# Altium PCB Motor PSU Webench.PcbDoc
Units mil, origin at the board's own origin, x right, y up, seen from the top; angles counter-clockwise.
Board outline 3150 x 2500 mil, 4 copper layers (Top Layer, MidLayer1, MidLayer2, Bottom Layer); 21 components, 13 nets, 50 pads, 42 vias.
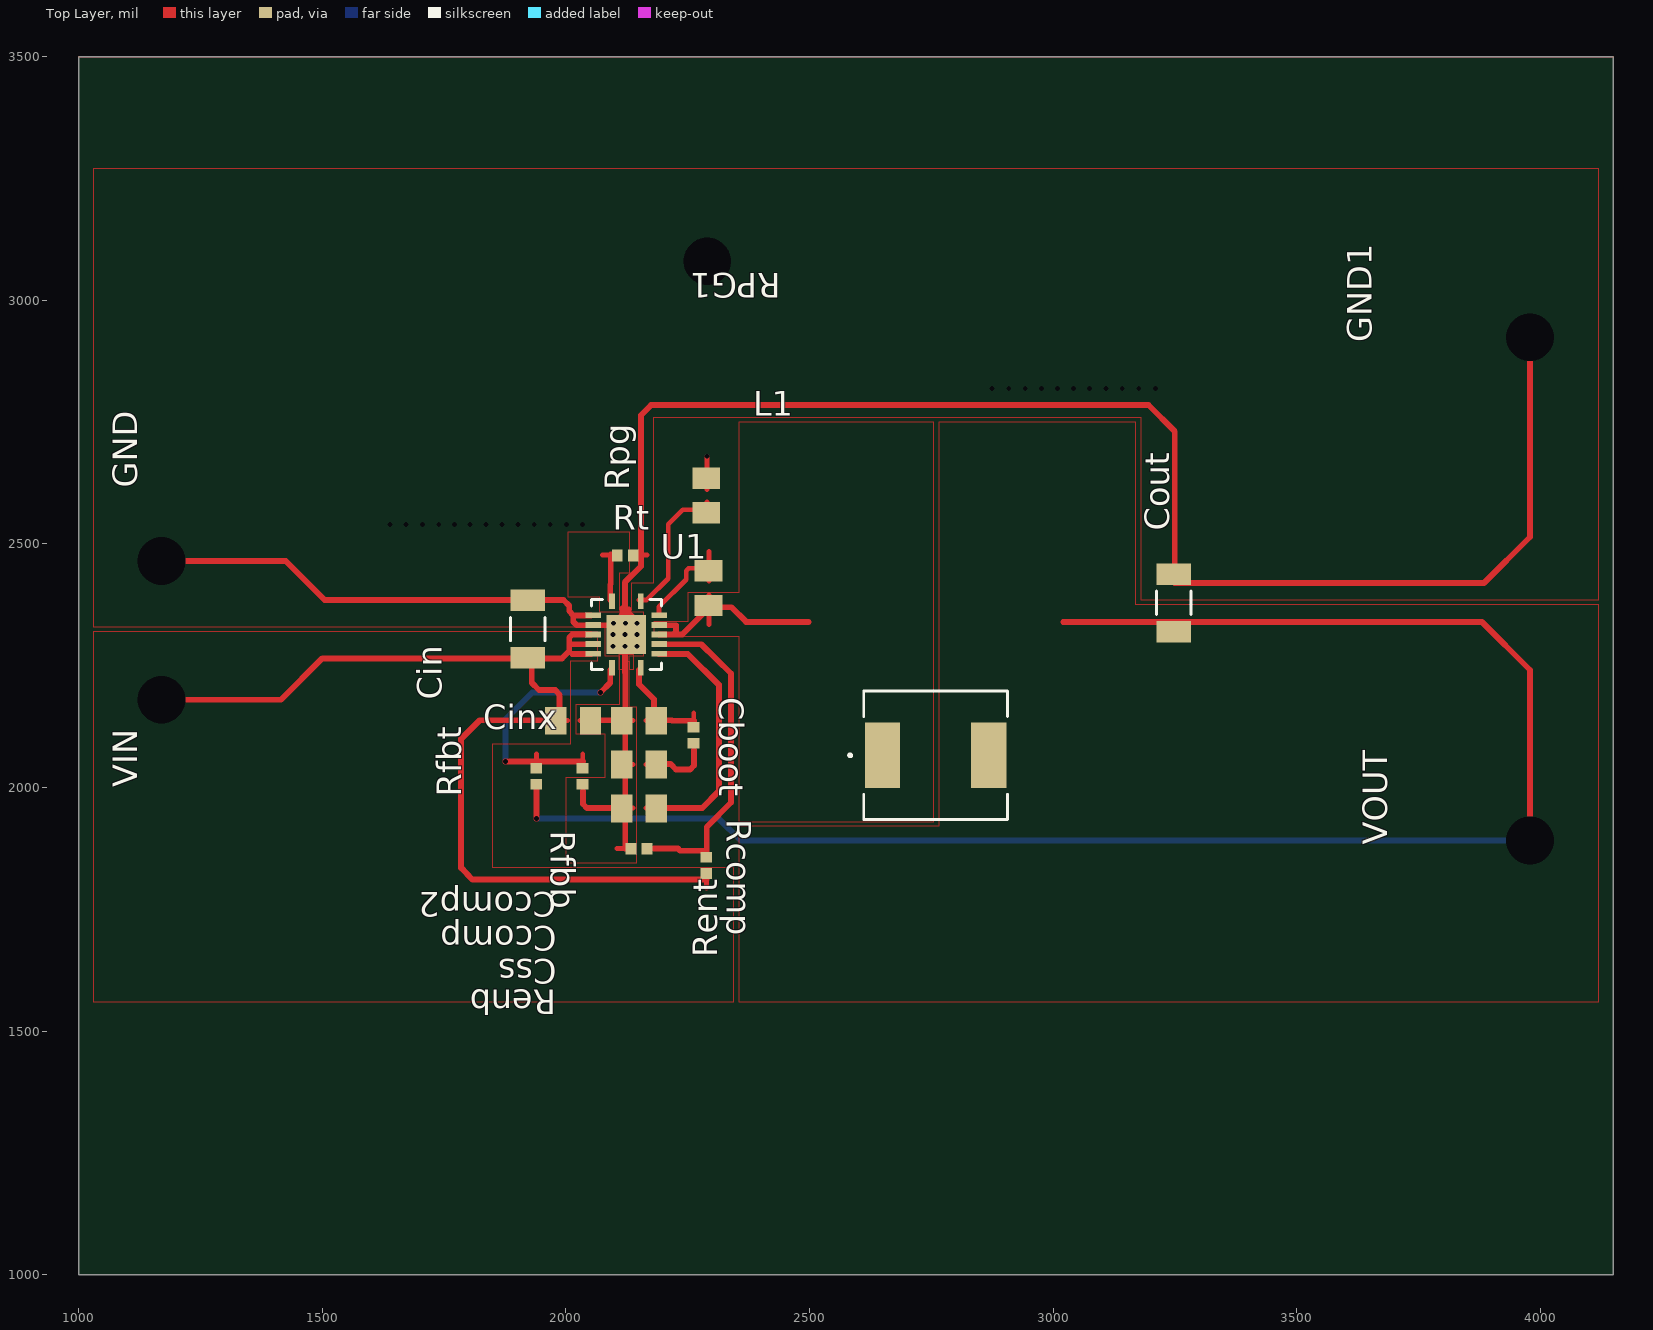
[diagram p0: Top Layer view]
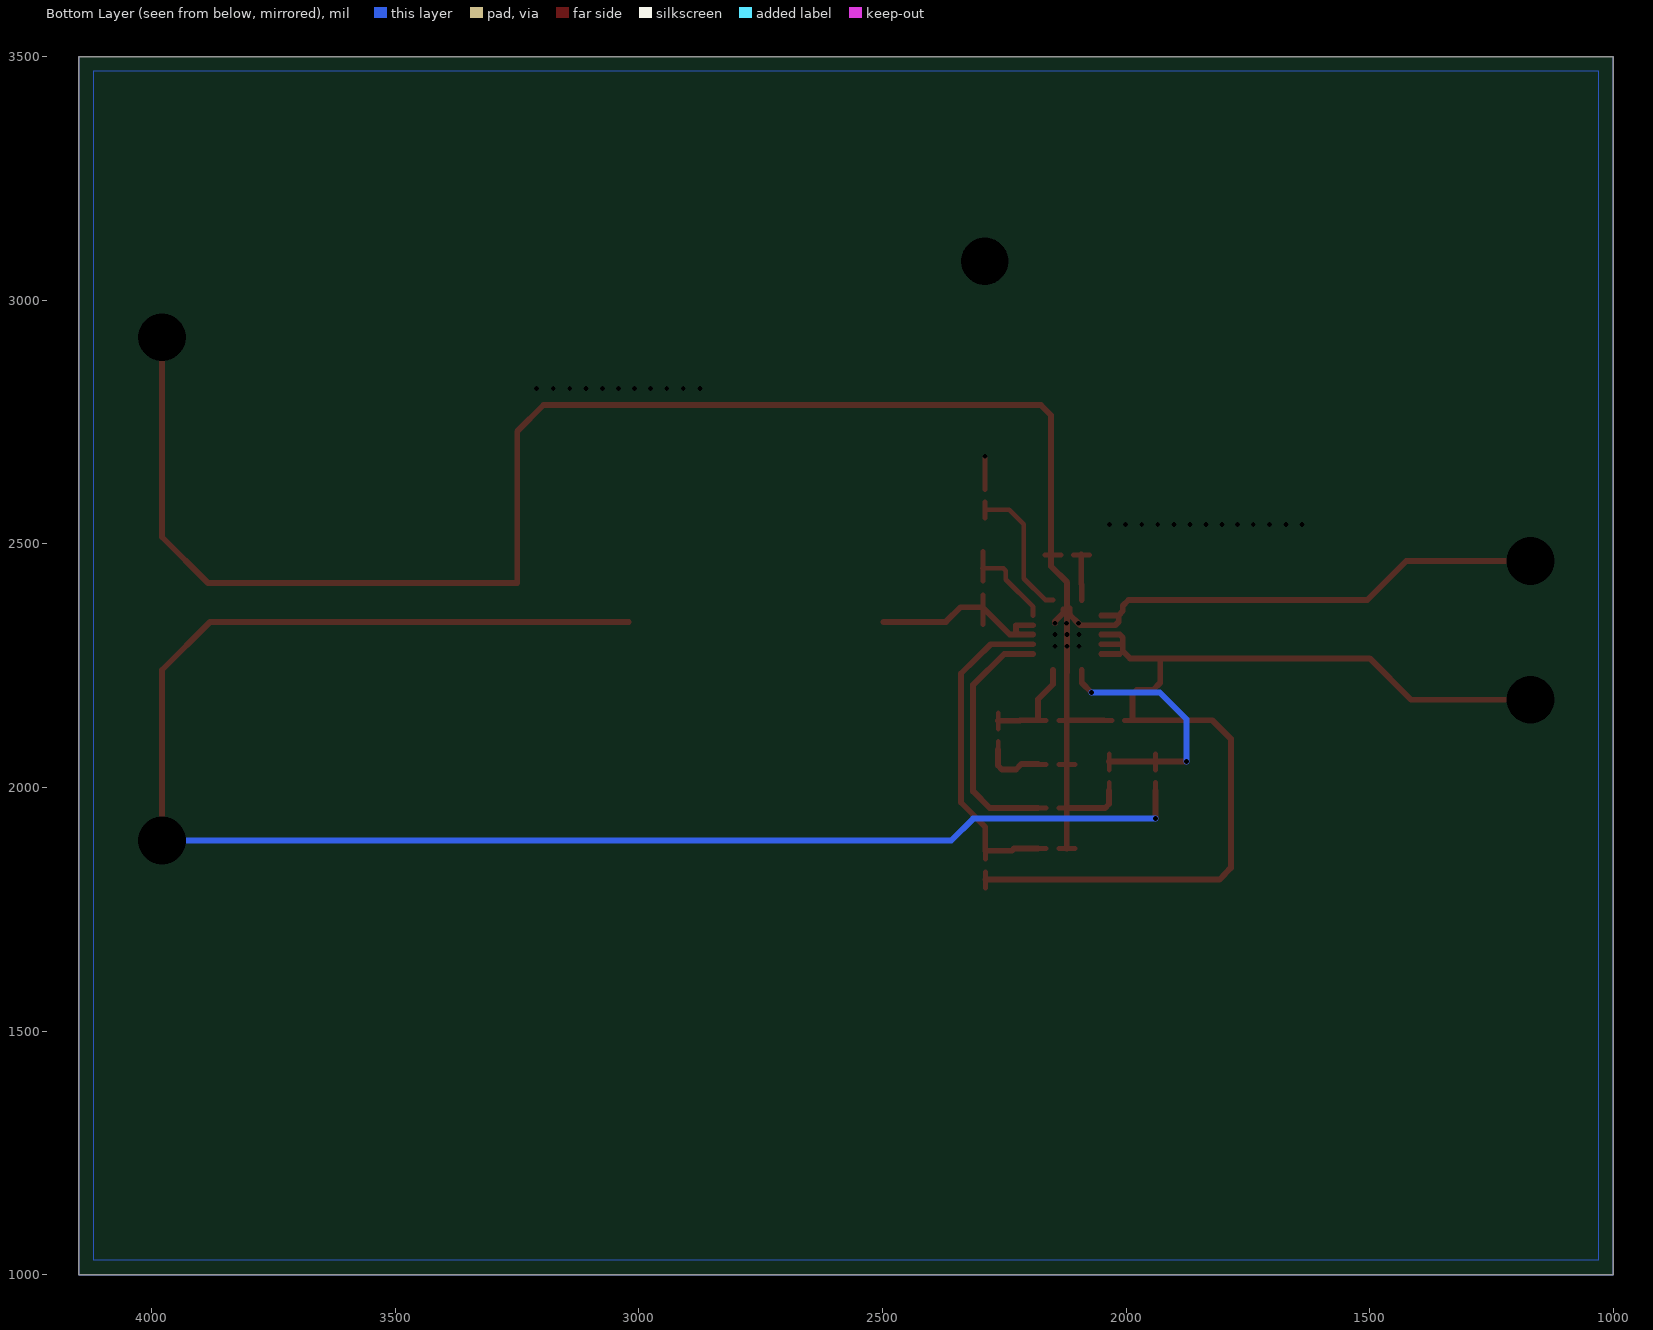
[diagram p1: Bottom Layer view, seen from below]
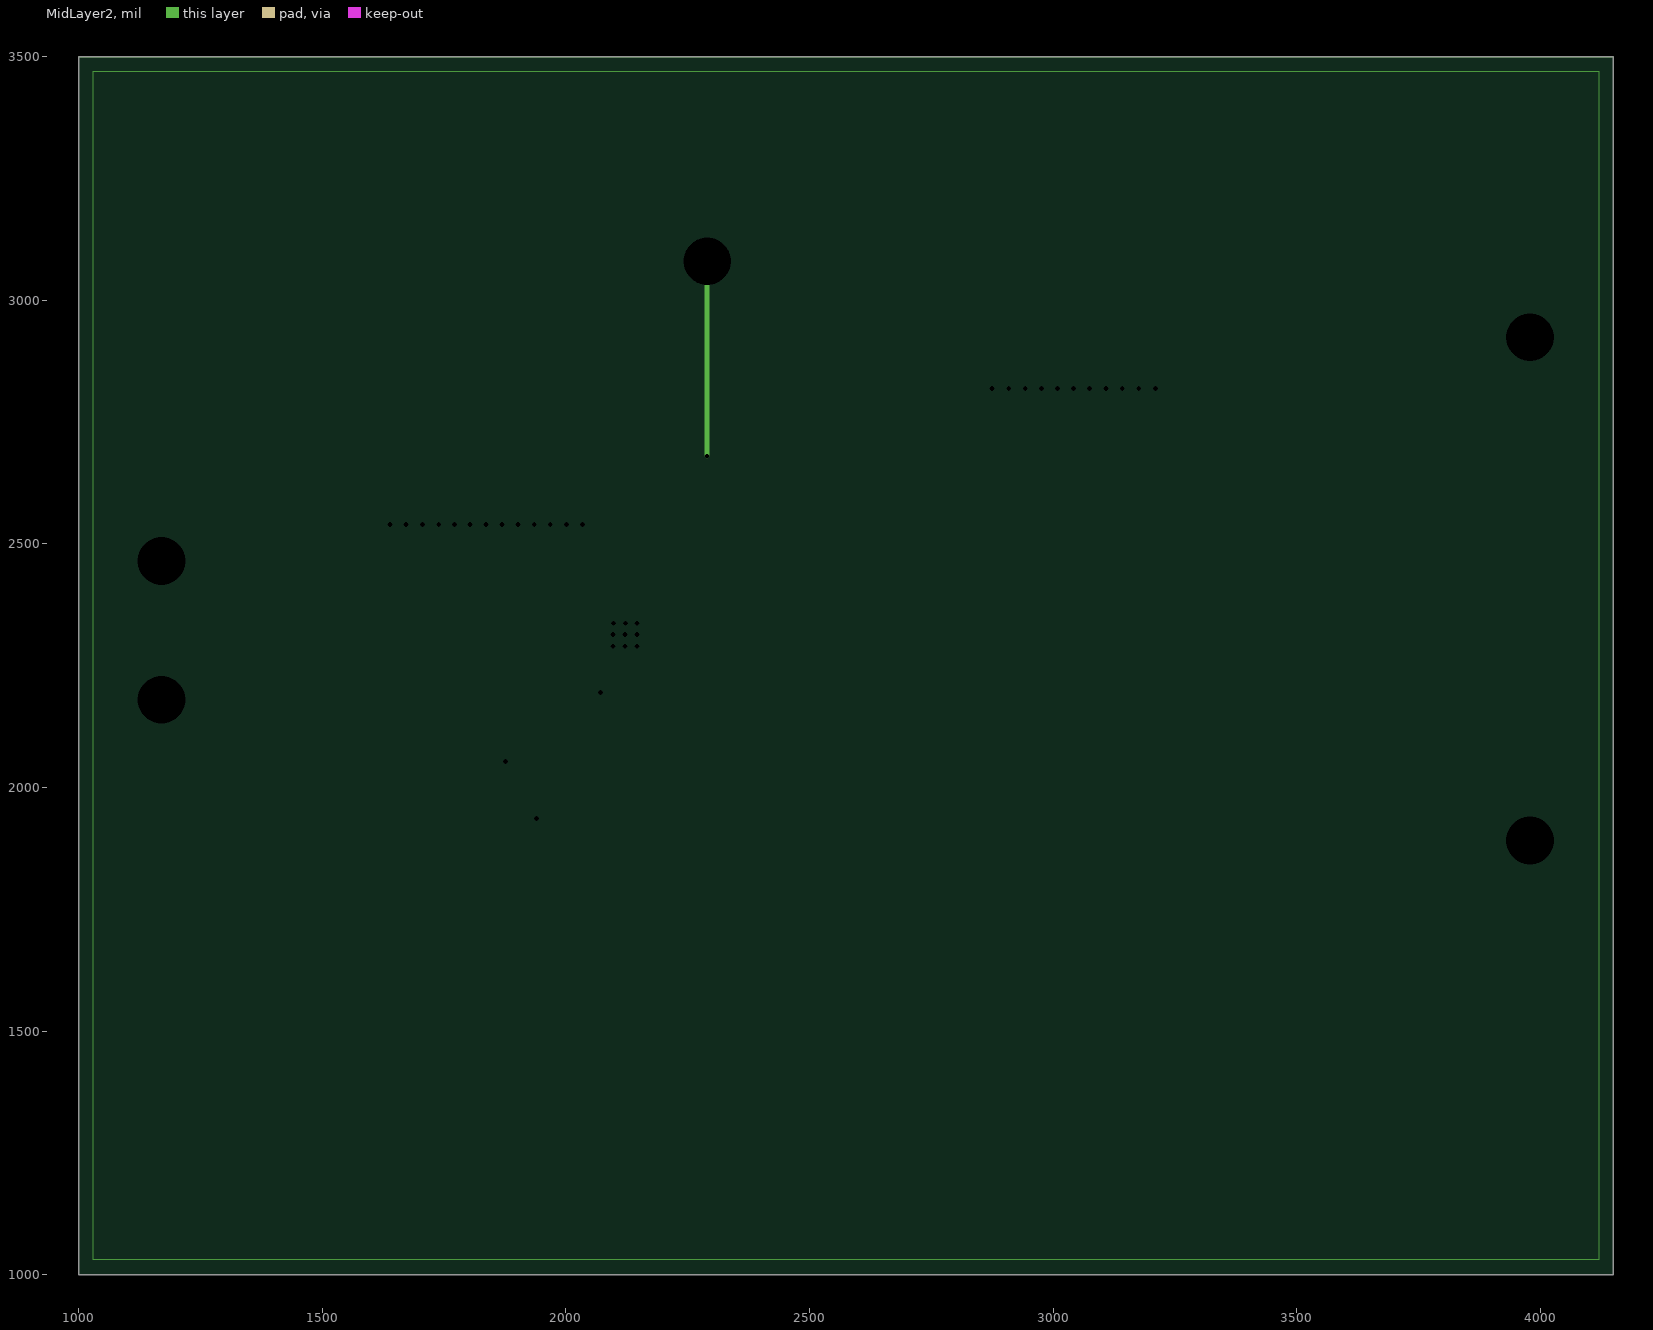
[diagram p2: MidLayer2]

## Layer stack, top to bottom
Top Layer: signal copper 1.4
Dielectric: core 12.6, FR-4, Dk 4.8
MidLayer1: signal copper 1.4
Dielectric: prepreg 12.6, FR-4, Dk 4.8
MidLayer2: signal copper 1.4
Dielectric: core 12.6, FR-4, Dk 4.8
Bottom Layer: signal copper 1.4

## Board outline
1000,1000 4150,1000 4150,3500 1000,3500

## Design rules (kind name [scope] priority, off if disabled: settings)
PlaneConnect [All] p0: scope1count=1 scope1_0_kind=Board scope1_0_value=Board scope2count=1 scope2_0_kind=Board scope2_0_value=Board commentlength=0 planeconnectstyle=Direct reliefexpansion=20 reliefentries=4 reliefconductorwidth=10 reliefairgap=10
PlaneConnect [All] p1: planeconnectstyle=Direct reliefexpansion=20 reliefentries=4 reliefconductorwidth=10 reliefairgap=10
PolygonConnect [All] p0: scope1count=1 scope1_0_kind=Board scope1_0_value=Board scope2count=1 scope2_0_kind=Board scope2_0_value=Board commentlength=0 connectstyle=Direct reliefconductorwidth=10 reliefentries=4 polygonreliefangle="90 Angle"
PolygonConnect [All] p1: connectstyle=Direct reliefconductorwidth=10 reliefentries=4 polygonreliefangle="90 Angle"

## Components (designator, comment, footprint, x,y, rotation, side; value= is the part's Value field where it differs from the comment)
Cboot "" 0805 2293,2409 r270 top
Ccomp "" 0805 2150,2047 r180 top
Ccomp2 "" 0805 2150,2137 r180 top
Cin "" 1206_190 1922,2325 r90 top
Cinx "" 0805 2015,2137 r0 top
Cout "" 1206_190 3248,2379 r90 top
Css "" 0805 2150,1957 r180 top
GND "" TP-1502 1168,2464 r90 top
GND1 "" TP-1502 3978,2923 r90 top
L1 "" SRP6540 2759,2066 r0 top
Rcomp "" 0402 2262,2107 r270 top
Renb "" 0402 2150,1874 r180 top
Rent "" 0402 2288,1840 r90 top
Rfbb "" 0402 2034,2023 r270 top
Rfbt "" 0402 1939,2023 r90 top
Rpg "" 0805 2288,2599 r90 top
RPG1 "" TP-1502 2288,3078 r180 top
Rt "" 0402 2122,2476 r0 top
U1 "" S-PVQFN-N14 2124,2314 r0 top
VIN "" TP-1502 1168,2179 r90 top
VOUT "" TP-1502 3978,1890 r90 top

## Footprints (in the part's own frame and the unit in brackets; to place one, negate y for a bottom-side part, rotate by r counter-clockwise, add the part's x,y. Pads: shape width x height; smd on the part's side, far side on the other; paste and mask are expansions set on the pad)
0402 [mil]
  rect 22x24 smd: 1(-16.5,0) 2(16.5,0)
0805 [mil]
  rect 44x57 smd: 1(-35.5,0) 2(35.5,0)
1206_190 [mil]
  rect 44x71 smd: 1(-59,0) 2(59,0)
  silkscreen extent -24,-36 24,36
S-PVQFN-N14 [mil]
  rect 12x31.69 smd: 1(-29.53,68.01) 7(-29.53,-68.01) 8(29.53,-68.01) 14(29.53,68.01)
  rect 31.69x12 smd: 2(-68.01,39.38) 3(-68.01,19.69) 4(-68.01,0) 5(-68.01,-19.69) 6(-68.01,-39.38) 9(68.01,-39.38) 10(68.01,-19.69) 11(68.01,0) 12(68.01,19.69) 13(68.01,39.38)
  rect 80.71x80.71 smd: 15(0,0)
  silkscreen extent -72,-72 72,72
SRP6540 [mil]
  rect 72.5x134 smd: 1(-109.25,0) 2(109.25,0)
  silkscreen extent -178,-132 148,132
TP-1502 [mil]
  round 65 / inner round 0 / far side round 65 hole 32: 1(0,0)

## Via types
v1: diameter 0, hole 10, Top Layer to Bottom Layer, 37 vias
v2: diameter 0, hole 98, Top Layer to Bottom Layer, 5 vias

## Nets (pads, with @x,y where several pads share a name; then routed paths per layer and width w, separated by ;. In a path a pad name is that pad's centre, name@x,y a point inside that pad or via, vN(x,y) a via of type N, cw(c..) or ccw(c..) an arc to the next point about the centre after c; other vN are vias at no path point)
0: Ccomp2.2 Ccomp.2 Cin.2 Cinx.2 Cout.2 Css.2 GND1.1 GND.1 Renb.2 Rfbb.2 Rt.2 U1.2 U1.3 U1.15 | length 5053.8
  Top Layer w10: Cinx.2@2029,2137.5 Cinx.2@2062,2137.5 ; 2034.5,1977 Rfbb.2@2034.5,2010 ; 2105,1874.5 Renb.2@2138,1874.5 ; Css.2@2105,1957.5 2138,1957.5 ; Ccomp.2@2105,2047.5 2138,2047.5 ; Ccomp2.2@2105,2137.5 2138,2137.5 ; U1.15@2115,2353 2115,2369 ; Rt.2@2134,2477.5 2167,2477.5
  Top Layer w12: v2(1170,2465) 1425,2465 1505,2385 1930,2385 1995,2385 2007,2373 2007,2362 2015,2353 ; 2035,1994 2035,1966 2043,1958 Css.2@2122,1958 ; Cinx.2@2046,2138 Ccomp2.2@2122,2138 ; U1.2@2051,2353 2015,2353 ; U1.15@2115,2353 2114,2353 v1(2098,2337) 2094,2333 2051,2333 2022,2333 2015,2340 2015,2353 ; 2122,1875 Css.2@2122,1958 ; 2129,2365 2129,2358 2146,2341 v1(2146,2337) ; v2(3979,2924) 3979,2514 3885,2420 3250,2420 3250,2731 3196,2785 2175,2785 2154,2764 2154,2454 2121,2421 v1(2121,2314) 2121,2236 2122,2235 Ccomp2.2@2122,2138 ; Css.2@2122,1958 2122,2048 Ccomp2.2@2122,2138
  other v1: 2097,2290 2121,2290 2146,2290 2097,2314 2146,2314 2122,2337 1639,2540 1672,2540 1706,2540 1739,2540 1771,2540 1803,2540 1836,2540 1869,2540 1902,2540 1935,2540 1968,2540 2001,2540 2034,2540 2875,2819 2909,2819 2943,2819 2976,2819 3009,2819 3042,2819 3075,2819 3109,2819 3142,2819 3176,2819 3210,2819
1: Ccomp2.1 Rcomp.1 U1.8 | length 264.8
  Top Layer w10: Ccomp2.1@2164,2137.5 Ccomp2.1@2197,2137.5 ; Rcomp.1@2262.5,2120 2262.5,2153
  Top Layer w12: U1.8@2150,2241 2150,2212 2181,2181 2181,2138 2218,2138 2218,2137 2263,2137
2: Renb.1 Rent.2 U1.10 | length 733.7
  Top Layer w10: Renb.1@2164,1874.5 2197,1874.5 ; Rent.2@2288.5,1853 2288.5,1886
  Top Layer w12: 2181,1875 2230,1875 2234,1870 2289,1870 2289,1919 2339,1969 2339,2234 2278,2294 U1.10@2191,2294
3: Rt.1 U1.1 | length 126.4
  Top Layer w10: 2075,2477.5 Rt.1@2108,2477.5
  Top Layer w12: U1.1@2091,2385 2091,2417 2092,2418 2092,2478
4: Css.1 U1.9 | length 547.9
  Top Layer w10: Css.1@2164,1957.5 Css.1@2197,1957.5
  Top Layer w12: Css.1@2181,1958 2280,1958 2314,1992 2314,2211 2250,2274 U1.9@2191,2274
5: Cboot.2 L1.1 U1.11 U1.12 | length 460.1
  Top Layer w10: 2294,2334 Cboot.2@2294,2395
  Top Layer w12: U1.11@2191,2314 2220,2314 ; U1.12@2191,2333 2226,2333 2226,2320 2220,2314 ; 2498,2340 2370,2340 2340,2370 2295,2370 2239,2314 2220,2314
6: Rfbb.1 Rfbt.2 U1.7 | length 584.1
  Top Layer w10: Rfbt.2@1939.5,2036 1939.5,2069 ; Rfbb.1@2034.5,2036 2034.5,2069
  Top Layer w12: v1(1876,2053) 1940,2053 2035,2053 ; v1(2071,2195) 2091,2215 U1.7@2091,2241
  Bottom Layer w12: v1(1876,2053) 1876,2140 1931,2195 v1(2071,2195)
7: Cout.1 L1.2 Rfbt.1 VOUT.1 | length 3497.6
  Top Layer w10: 1939.5,1977 Rfbt.1@1939.5,2010
  Top Layer w12: v1(1940,1936) 1940,1994 ; 3021,2340 3250,2340 3880,2340 3979,2241 v2(3979,1891)
  Bottom Layer w12: v1(1940,1936) 2314,1936 2359,1891 v2(3979,1891)
8: Cin.1 Cinx.1 Rent.1 U1.4 U1.5 U1.6 VIN.1 | length 2267.6
  Top Layer w10: Cinx.1@1970,2137.5 2003,2137.5 ; 2288.5,1794 Rent.1@2288.5,1827
  Top Layer w12: v2(1170,2180) 1415,2180 1500,2265 Cin.1@1930,2265 ; 2013,2274 U1.6@2051,2274 ; U1.5@2051,2294 2007,2294 ; U1.4@2051,2314 2013,2314 2007,2308 2007,2294 ; 2289,1811 1808,1811 1785,1835 1785,2100 1823,2138 1987,2138 1987,2190 1978,2200 1945,2200 1930,2215 Cin.1@1930,2265 ; Cin.1@1930,2265 1992,2265 2007,2280 2007,2294
9: Ccomp.1 Rcomp.2 | length 188.9
  Top Layer w10: Ccomp.1@2164,2047.5 Ccomp.1@2197,2047.5 ; 2262.5,2061 Rcomp.2@2262.5,2094
  Top Layer w12: Ccomp.1@2181,2048 2215,2048 2226,2037 2255,2037 2263,2045 2263,2078
13: Cboot.1 U1.13 | length 226.3
  Top Layer w10: U1.13@2191,2353 2191,2371 2247,2427 2247,2445 2252,2450 Cboot.1@2295,2450 ; Cboot.1@2294,2424 2294,2485
24: Rpg.1 U1.14 | length 314.7
  Top Layer w10: U1.14@2150,2385 2166,2385 2210,2429 2210,2540 2240,2570 Rpg.1@2290,2570 ; Rpg.1@2289.5,2553 2289.5,2586
26: RPG1.1 Rpg.2 | length 484
  Top Layer w10: 2289.5,2612 Rpg.2@2289.5,2645 ; Rpg.2@2290,2629 v1(2290,2680)
  MidLayer2 w10: v1(2290,2680) v2(2290,3080)

## Polygon pours and split planes (outlines as drawn)
7 on Top Layer " " (solid, pour order 0): 2355,1560 4120,1560 4120,2375 3170,2375 3170,2750 2765,2750 2765,1920 2355,1920
8 on Top Layer " " (solid, pour order 1): 2065,2320 1030,2320 1030,1560 2345,1560 2345,1835 1850,1835 1850,2090 2010,2090 2010,2260 2065,2260
5 on Top Layer " " (solid, pour order 2): 2180,2310 2355,2310 2355,1930 2755,1930 2755,2750 2355,2750 2355,2400 2250,2400 2250,2340 2180,2340
0 on Top Layer " " (solid, pour order 3): 3180,2760 3180,2385 4120,2385 4120,3270 1030,3270 1030,2330 2080,2330 2080,2270 2110,2270 2110,2170 2020,2170 2020,2110 2080,2110 2080,2020 2000,2020 2000,1845 2145,1845 2145,2165 2130,2165 2130,2270 2160,2270 2160,2360 2070,2360 2070,2390 2005,2390 2005,2525 2130,2525 2130,2440 2110,2440 2110,2365 2135,2365 2135,2420 2180,2420 2180,2760
0 on Bottom Layer " " (solid, pour order 6): 1030,1030 1030,3470 4120,3470 4120,1030
0 on MidLayer1 " " (solid, pour order 4): 1030,1030 1030,3470 4120,3470 4120,1030
0 on MidLayer2 " " (solid, pour order 5): 1030,1030 1030,3470 4120,3470 4120,1030
no net on Top Layer "Top Layer-No Net" (solid, remove dead copper): 2138.76,2273.65 2138.76,2242.15 2130.89,2242.15 2130.89,2257.9 2117.11,2257.9 2117.11,2242.15 2109.24,2242.15 2109.24,2273.65
no net on Top Solder "Top Layer-No Net" (solid, remove dead copper): 2138.76,2273.65 2138.76,2242.15 2130.89,2242.15 2130.89,2257.9 2117.11,2257.9 2117.11,2242.15 2109.24,2242.15 2109.24,2273.65
no net on Top Paste "Top Layer-No Net" (solid, remove dead copper): 2138.76,2273.65 2138.76,2242.15 2130.89,2242.15 2130.89,2273.65
no net on Top Paste "Top Layer-No Net" (solid, remove dead copper): 2117.11,2273.65 2117.11,2242.15 2109.24,2242.15 2109.24,2273.65

## Other copper
Multi-Layer:
  the board outline again, w1